# Altium PCB ATmega.PcbDoc
Units mil, origin at the board's own origin, x right, y up, seen from the top; angles counter-clockwise.
Board outline 4033 x 3869 mil, 2 copper layers (Top Layer, Bottom Layer); 73 components, 67 nets, 249 pads, 35 vias.
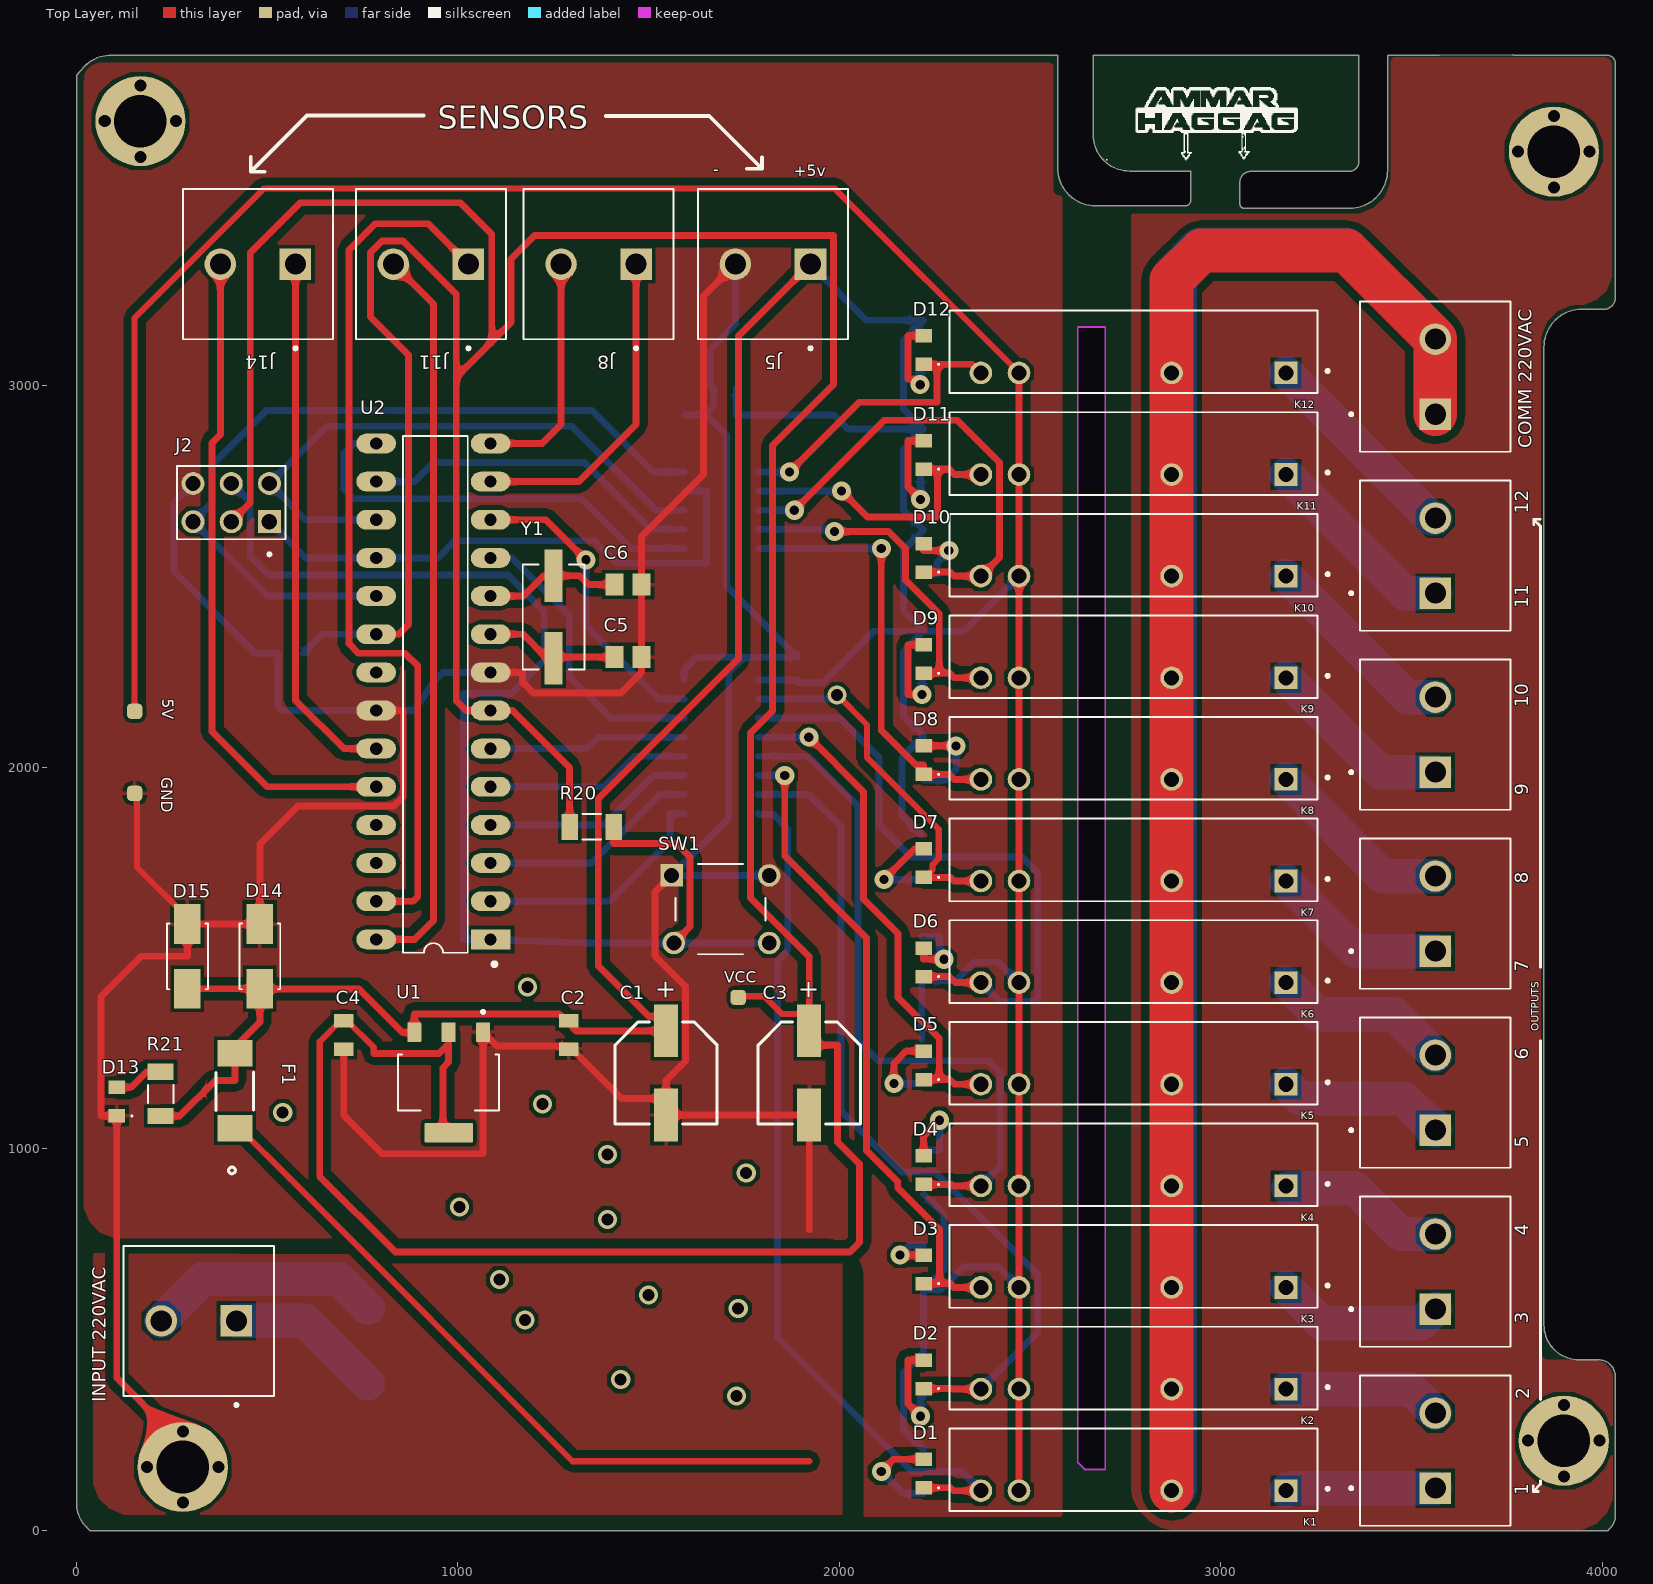
[diagram p0: Top Layer view]
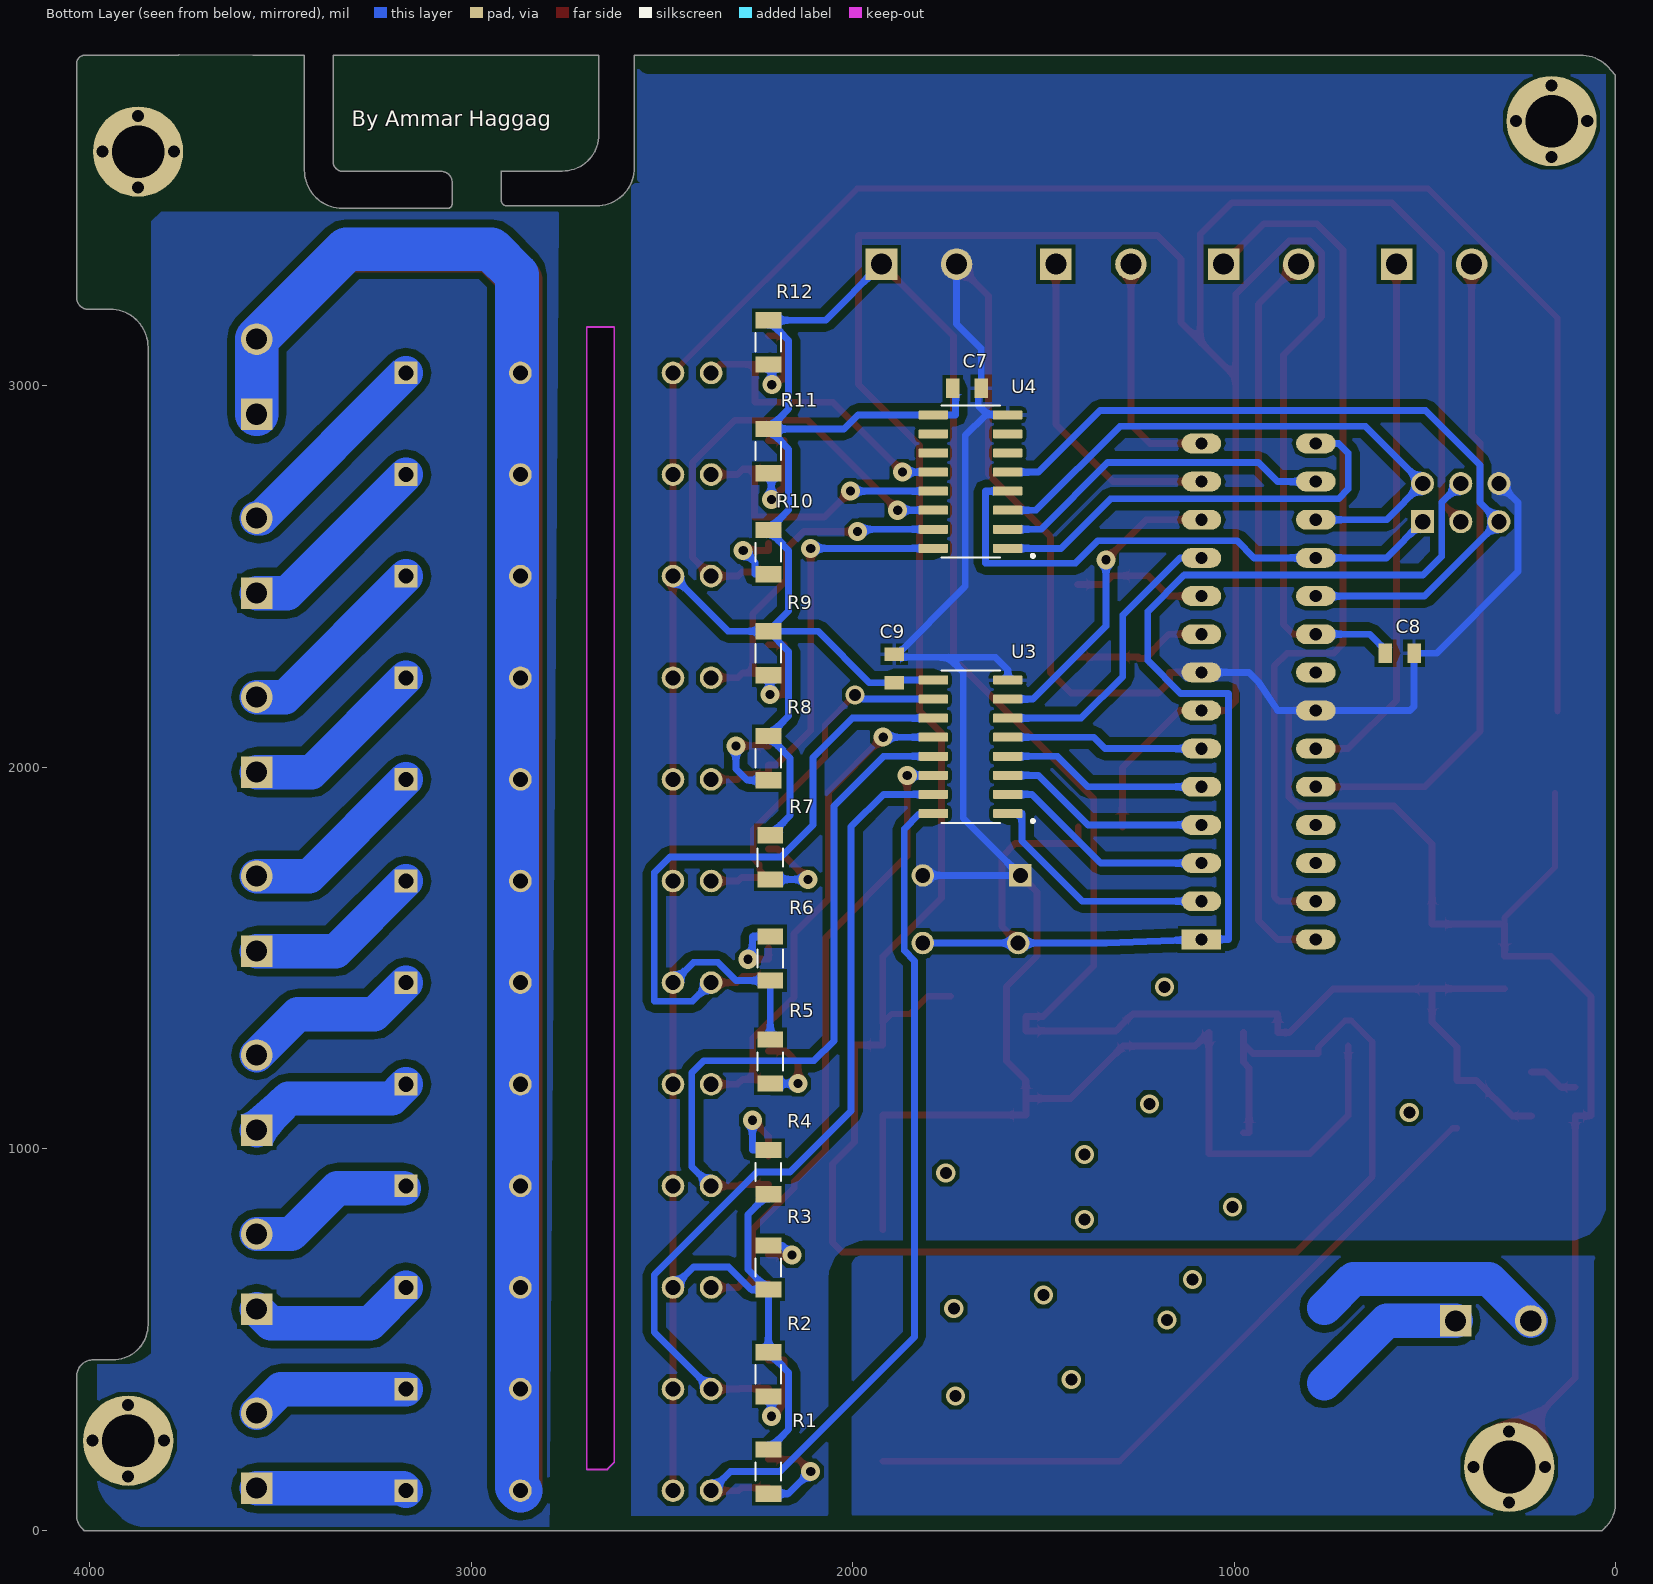
[diagram p1: Bottom Layer view, seen from below]
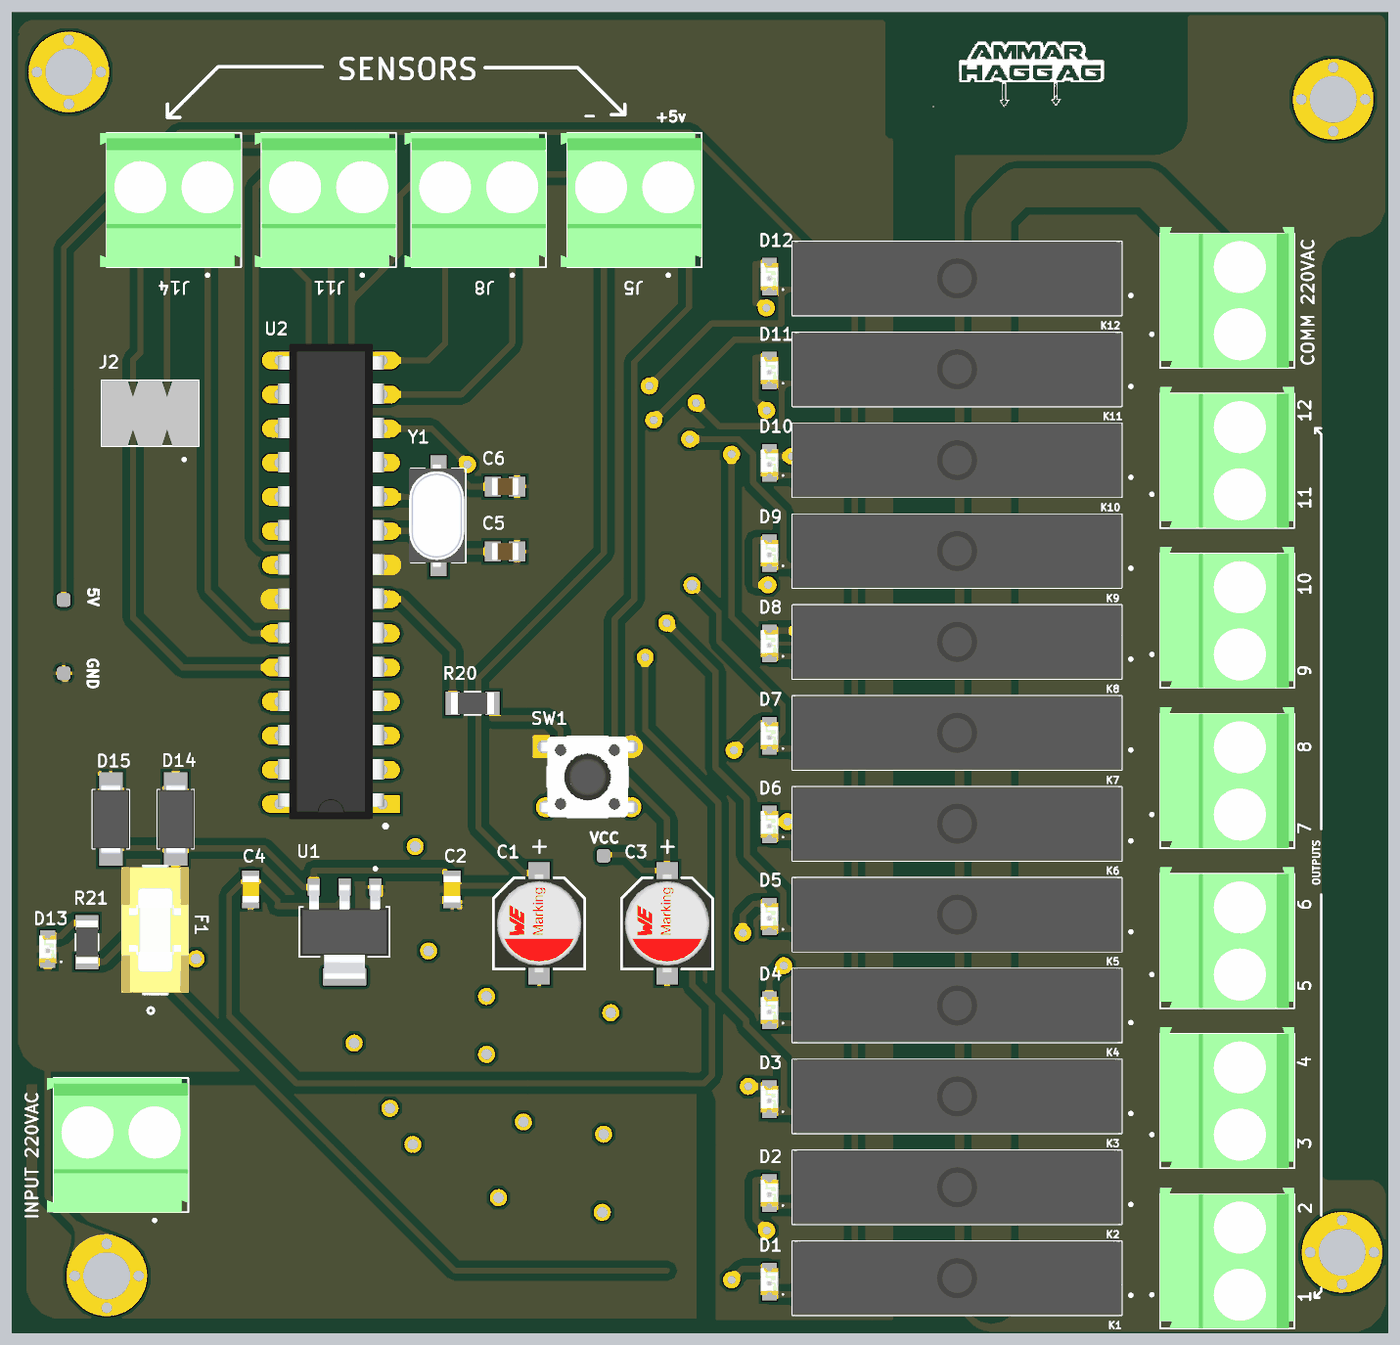
[diagram p2: 3D render of the assembled board from above, using the file's embedded part models]
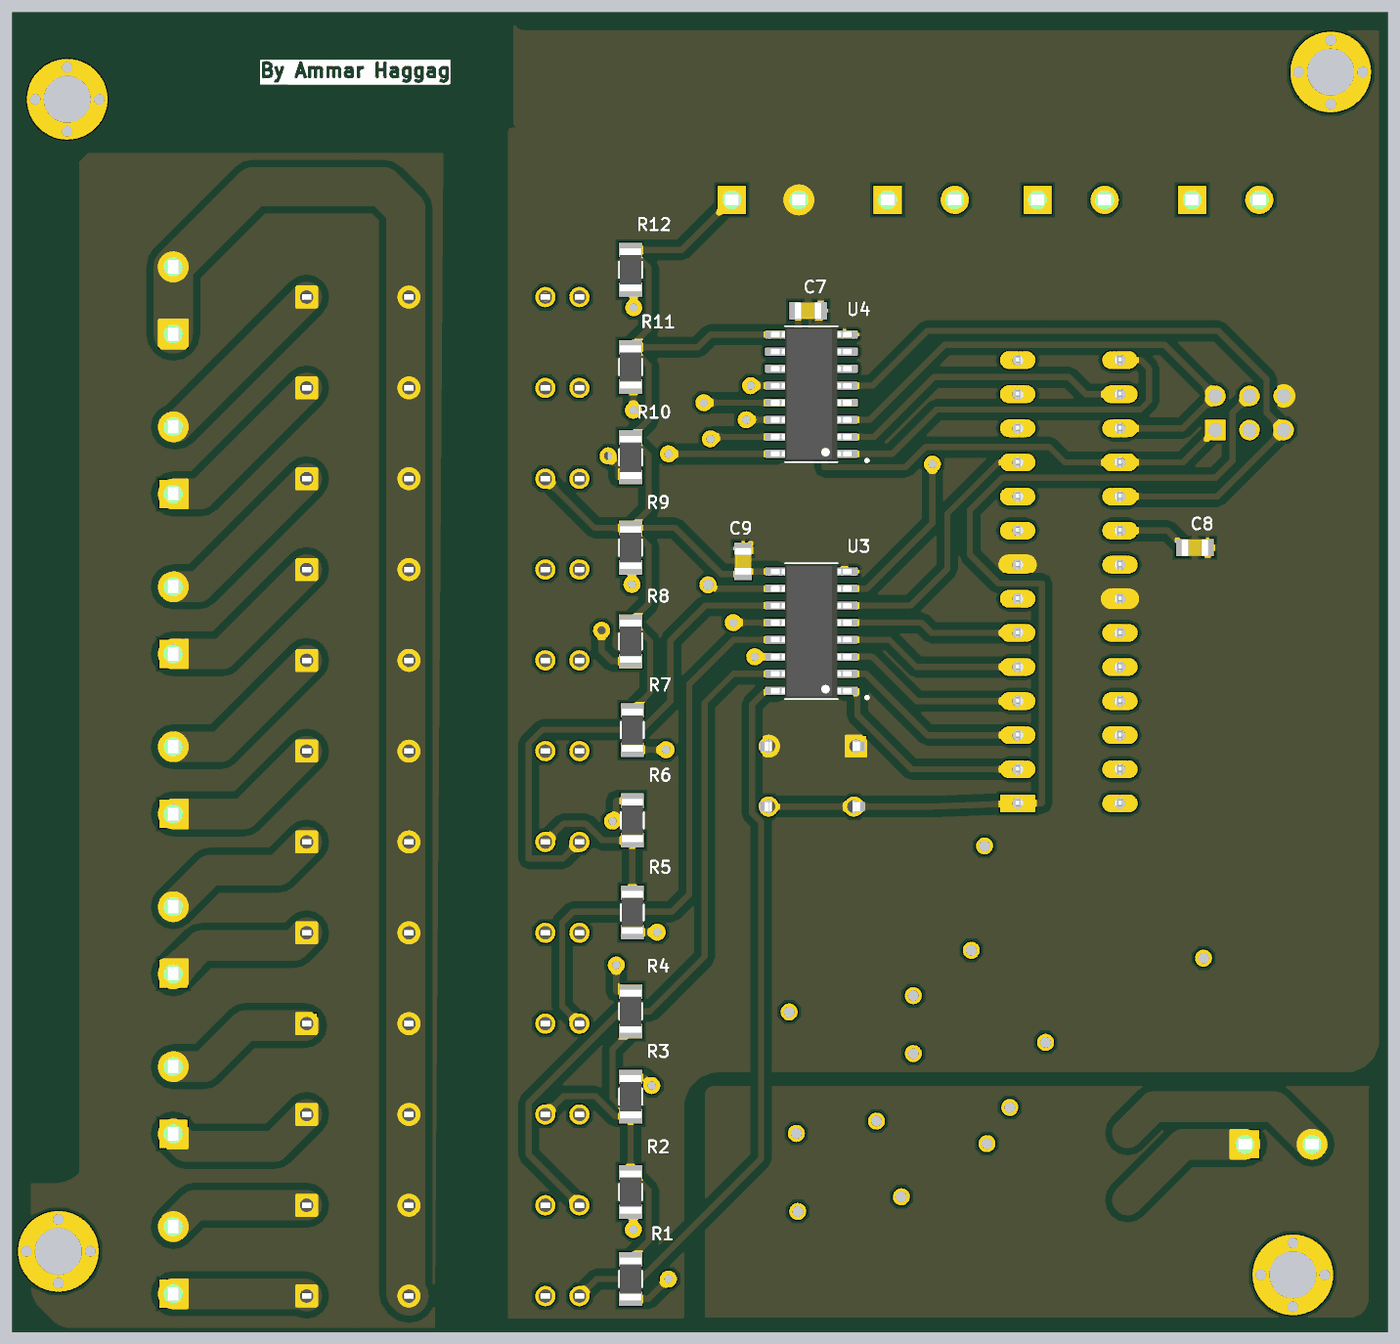
[diagram p3: 3D render of the assembled board from below, using the file's embedded part models]

## Layer stack, top to bottom
Top Solder: solder mask 0.4, Solder Resist, Dk 3.5
Top Layer: signal copper 1.4
Dielectric 1: dielectric 12.6, FR-4, Dk 4.8
Bottom Layer: signal copper 1.4
Bottom Solder: solder mask 0.4, Solder Resist, Dk 3.5

## Board outline
2572,3867 2572,3572 ccw(c2672,3572) 2672,3472 2907,3472 ccw(c2907,3486) 2921,3486 2921,3562 ccw(c2920,3562) 2920,3563 2761,3563 cw(c2761,3659) 2665,3659 2665,3867 3362,3867 3362,3588 cw(c3336,3588) 3336,3562 3078,3562 ccw(c3078,3534) 3050,3534 3050,3477 ccw(c3062,3477) 3062,3465 3337,3465 ccw(c3337,3565) 3437,3565 3437,3867 3573,3867 3765,3868 3766,3867 4012,3867 cw(c4012,3845) 4034,3845 4034,3230 cw(c4005,3230) 4005,3201 3947,3201 ccw(c3947,3101) 3847,3101 3847,539 ccw(c3939,539) 3939,447 3987,447 3991,447 cw(c3991,404) 4034,404 4034,37.65 cw(c3986.94,38.49) 4019.61,4.61 4014,-1 36,-1 27.04,7.96 cw(c84.08,68.41) 1,66 1,3815 21.71,3837.71 cw(c92.42,3767.01) 92.42,3867 2207,3867 2209,3867 2396,3867
cut-out: 2625,178 2643,160 2696,160 2697,159 2697,3154 2625,3154

## Design rules (kind name [scope] priority, off if disabled: settings)
Clearance GND_p [InNamedPolygon('GND_p')] p1: gap=10 ignorepadtopadclearanceinfootprint=FALSE except(0: Arc-Hole Track-Hole SMDPad-Hole THPad-Hole Via-Hole Fill-Hole Poly-Hole Region-Hole Text-Hole; 20: Track-Poly)
Clearance [All] p2: gap=10 ignorepadtopadclearanceinfootprint=FALSE except(20: Arc-Arc Arc-Track Track-Track)
HoleSize [All] p1: absolutevalues=TRUE maxlimit=137.8 minlimit=11.81 maxpercent=80.000 minpercent=20.000
MinimumSolderMaskSliver [All] p1: minsoldermaskwidth=1
PolygonConnect [All] p1: thpad.connectstyle=Direct thpad.reliefconductorwidth=10 thpad.reliefentries=4 thpad.polygonreliefangle="90 Angle" thpad.airgapwidth=10 smdpad.connectstyle=Relief smdpad.reliefconductorwidth=10 smdpad.reliefentries=4 smdpad.polygonreliefangle="90 Angle" smdpad.airgapwidth=10 via.connectstyle=Direct via.reliefconductorwidth=10 via.reliefentries=4 via.polygonreliefangle="90 Angle" via.airgapwidth=10
RoutingVias [All] p1: holewidth=24 width=50 viastyle="Through Hole" minholewidth=24 minwidth=50 maxholewidth=31.5 maxwidth=50
SilkToSilkClearance [All] p1: silktosilkclearance=1
SilkToSolderMaskClearance [IsPad] p1: minsilkscreentomaskgap=1 clearancetoexposedcopper=TRUE
SolderMaskExpansion [All] p1: expansion=4 istentingtop=FALSE
Width [All] p1: maxlimit=115 minlimit=16 preferedwidth=90 minimp=50.000000 maximp=50.000000 favimp=50.000000
26 further rules are at their usual default settings.

## Components (designator, comment, footprint, x,y, rotation, side; value= is the part's Value field where it differs from the comment)
1 "282856-2" TE_282856-2 3562.14,209 r90 top
3 "282856-2" TE_282856-2 3562.14,678.17 r90 top
5 "282856-2" TE_282856-2 3562.14,1147.33 r90 top
5V "TEST POINT" "TEST POINT" 153,2107 r0 top
7 "282856-2" TE_282856-2 3562.14,1616.5 r90 top
9 "282856-2" TE_282856-2 3562.14,2085.67 r90 top
11 "282856-2" TE_282856-2 3562.14,2554.83 r90 top
C1 "47uF" WCAP-ASLI_D6.3H7.7 1546,1199 r90 top
C2 "100nF" WCAP-CSGP_0805_L2W1.25H0.8_Reflow 1291,1299 r90 top
C3 "47uF" WCAP-ASLI_D6.3H7.7 1921,1199 r90 top
C4 "100nF" WCAP-CSGP_0805_L2W1.25H0.8_Reflow 701,1299 r90 top
C5 "22pf" CAPC2012X130N 1446,2289 r180 top
C6 "22pf" CAPC2012X130N 1446,2479 r180 top
C7 "100nF" WCAP-CSGP_0805_L2W1.25H0.8_Reflow 1700.53,2994 r0 bottom
C8 "100nF" WCAP-CSGP_0805_L2W1.25H0.8_Reflow 566,2299 r0 bottom
C9 "100nF" WCAP-CSGP_0805_L2W1.25H0.8_Reflow 1891,2259 r270 bottom
"COMM 220VAC" "COM" TE_282856-2 3562.14,3024 r90 top
D1 "Infrared, 1.4V, 140°" WL-SICW_0805_L2W1.3H0.8 2221,149 r90 top
D2 "Infrared, 1.4V, 140°" WL-SICW_0805_L2W1.3H0.8 2221,409 r90 top
D3 "Infrared, 1.4V, 140°" WL-SICW_0805_L2W1.3H0.8 2221,684 r90 top
D4 "Infrared, 1.4V, 140°" WL-SICW_0805_L2W1.3H0.8 2221,944 r90 top
D5 "Infrared, 1.4V, 140°" WL-SICW_0805_L2W1.3H0.8 2221,1219 r90 top
D6 "Infrared, 1.4V, 140°" WL-SICW_0805_L2W1.3H0.8 2221,1489 r90 top
D7 "Infrared, 1.4V, 140°" WL-SICW_0805_L2W1.3H0.8 2221,1749 r90 top
D8 "Infrared, 1.4V, 140°" WL-SICW_0805_L2W1.3H0.8 2221,2019 r90 top
D9 "Infrared, 1.4V, 140°" WL-SICW_0805_L2W1.3H0.8 2221,2284 r90 top
D10 "Infrared, 1.4V, 140°" WL-SICW_0805_L2W1.3H0.8 2221,2549 r90 top
D11 "Infrared, 1.4V, 140°" WL-SICW_0805_L2W1.3H0.8 2221,2819 r90 top
D12 "Infrared, 1.4V, 140°" WL-SICW_0805_L2W1.3H0.8 2221,3094 r90 top
D13 "Infrared, 1.4V, 140°" WL-SICW_0805_L2W1.3H0.8 106,1124 r90 top
D14 "S1G" DIO_S1G 481,1504.35 r90 top
D15 "S1G" DIO_S1G 291,1504.35 r90 top
F1 "0154004.DR" FUSE_0154004.DR 415.88,1054 r90 top
GND "TEST POINT" "TEST POINT" 193,1932 r90 top
"INPUT 220VAC" "282856-2" TE_282856-2 321,549 r180 top
J2 "5-146257-3" TE_5-146257-3 406,2694 r180 top
J5 "282856-2" TE_282856-2 1826,3319 r180 top
J8 "282856-2" TE_282856-2 1368.95,3319 r180 top
J11 "282856-2" TE_282856-2 929.43,3319 r180 top
J14 "282856-2" TE_282856-2 476,3319 r180 top
K1 "RELLAY" RELAY_G3MB-202PDC5 2771,159 r180 top
K2 "G3MB-202PDC5" RELAY_G3MB-202PDC5 2771,425.36 r180 top
K3 "G3MB-202PDC5" RELAY_G3MB-202PDC5 2771,691.73 r180 top
K4 "G3MB-202PDC5" RELAY_G3MB-202PDC5 2771,958.09 r180 top
K5 "G3MB-202PDC5" RELAY_G3MB-202PDC5 2771,1224.45 r180 top
K6 "G3MB-202PDC5" RELAY_G3MB-202PDC5 2771,1490.82 r180 top
K7 "G3MB-202PDC5" RELAY_G3MB-202PDC5 2771,1757.18 r180 top
K8 "G3MB-202PDC5" RELAY_G3MB-202PDC5 2771,2023.55 r180 top
K9 "G3MB-202PDC5" RELAY_G3MB-202PDC5 2771,2289.91 r180 top
K10 "G3MB-202PDC5" RELAY_G3MB-202PDC5 2771,2556.27 r180 top
K11 "G3MB-202PDC5" RELAY_G3MB-202PDC5 2771,2822.64 r180 top
K12 "G3MB-202PDC5" RELAY_G3MB-202PDC5 2771,3089 r180 top
R1 "1k" RESC3216X70N 2221,154 r90 bottom
R2 "1k" RESC3216X70N 2221,409 r90 bottom
R3 "1k" RESC3216X70N 2221,689 r270 bottom
R4 "1k" RESC3216X70N 2221,939 r270 bottom
R5 "1k" RESC3216X70N 2216,1229 r90 bottom
R6 "1k" RESC3216X70N 2216,1499 r270 bottom
R7 "1k" RESC3216X70N 2216,1764 r90 bottom
R8 "1k" RESC3216X70N 2221,2024 r90 bottom
R9 "1k" RESC3216X70N 2221,2299 r90 bottom
R10 "1k" RESC3216X70N 2221,2564 r90 bottom
R11 "1k" RESC3216X70N 2221,2829 r90 bottom
R12 "1k" RESC3216X70N 2221,3114 r90 bottom
R20 "10K" RESC3216X70N 1351,1844 r0 top
R21 "FCR1206J10R" RESC3216X70N 221,1144 r90 top value=330R
SW1 "3-1825910-1" TE_3-1825910-1 1688.24,1628.13 r0 top
U1 "AMS1117" SOT229P700X180-4N 976,1174 r270 top
U2 "ATMEGA328P-PU" DIL28 936,2199 r180 top
U3 "ULN2003AD" SOIC127P600X175-16N 1691,2054 r0 bottom
U4 "ULN2003AD" SOIC127P600X175-16N 1691,2749 r0 bottom
VCC "TEST POINT" "TEST POINT" 1775,1397 r90 top
Y1 "16MHz" XTAL_ECS-160-20-3X-TR 1251,2394 r270 top

## Footprints (in the part's own frame and the unit in brackets; to place one, negate y for a bottom-side part, rotate by r counter-clockwise, add the part's x,y. Pads: shape width x height; smd on the part's side, far side on the other; paste and mask are expansions set on the pad)
CAPC2012X130N [mm]
  rect 1.21x1.47 smd: 1(-0.898,0) 2(0.898,0)
  body extent -1.02,-0.65 0.98,0.65, height 1.21
DIL28 [mil]
  rect 104x52 hole 32: 1(-150,650)
  oval 104x52 hole 32: 2(-150,550) 3(-150,450) 4(-150,350) 5(-150,250) 6(-150,150) 7(-150,50) 8(-150,-50) 9(-150,-150) 10(-150,-250) 11(-150,-350) 12(-150,-450) 13(-150,-550) 14(-150,-650) 15(150,-650) 16(150,-550) 17(150,-450) 18(150,-350) 19(150,-250) 20(150,-150) 21(150,-50) 22(150,50) 23(150,150) 24(150,250) 25(150,350) 26(150,450) 27(150,550) 28(150,650)
  silkscreen extent -165,-670 80,720, body extent -155,-699 155,695, height 205
DIO_S1G [mm]
  rect 2.65x1.75 smd: 1(-2.15,0) 2(2.15,0)
  silkscreen extent -2.19,-1.36 2.19,1.36, body extent -2.6,-1.36 2.6,1.36, height 2.7
FUSE_0154004.DR [mm]
  rect 1.748x2.347 smd: 1(0,0) 2(5,0)
  silkscreen extent -3.03,-1.25 3.74,1.28, body extent -1.67,-2.64 8.06,2.39, height 3.81
RELAY_G3MB-202PDC5 [mm]
  rect 1.508x1.508 hole 1: 1(-10.16,1.4)
  round 1.508 hole 1: 2(-2.54,1.4) 3(7.62,1.4) 4(10.16,1.4)
  silkscreen extent -13.03,-2.75 12.25,2.75, body extent -12.25,-2.75 12.25,2.75, height 20.5
RESC3216X70N [mm]
  rect 1.08x1.72 smd: 1(-1.47,0) 2(1.47,0)
  silkscreen extent -0.61,-0.85 0.61,0.85, body extent -1.6,-0.8 1.6,0.8, height 0.71
SOIC127P600X175-16N [mm]
  rrect25% 1.97x0.6 smd: 1(-2.475,4.445) 2(-2.475,3.175) 3(-2.475,1.905) 4(-2.475,0.635) 5(-2.475,-0.635) 6(-2.475,-1.905) 7(-2.475,-3.175) 8(-2.475,-4.445) 9(2.475,-4.445) 10(2.475,-3.175) 11(2.475,-1.905) 12(2.475,-0.635) 13(2.475,0.635) 14(2.475,1.905) 15(2.475,3.175) 16(2.475,4.445)
  silkscreen extent -4.24,-5.06 1.95,5.06, body extent -3,-4.95 3,4.95, height 1.75
SOT229P700X180-4N [mm]
  rrect15% 1.31x0.93 smd: 1(-3.345,2.29) 2(-3.345,0) 3(-3.345,-2.29)
  rrect15% 1.31x3.24 smd: 4(3.345,0)
  silkscreen extent -4.8,-3.36 1.86,3.36, body extent -3.5,-3.25 3.5,3.25, height 1.8
TE_3-1825910-1 [mm]
  rect 1.498x1.498 / inner round 1.498 / far side rect 1.498x1.498 hole 0.99: 1(-3.25,2.25)
  round 1.498 hole 0.99: 2(3.25,2.25) 3(-3.1,-2.25) 4(3.25,-2.25)
  silkscreen extent -3,-3 3,3, body extent -3.9,-3 3.9,3, height 17.01
TE_5-146257-3 [mm]
  rect 1.53x1.53 / inner round 1.53 / far side rect 1.53x1.53 hole 1.02: 1(-2.54,1.27)
  round 1.53 hole 1.02: 2(0,1.27) 3(2.54,1.27) 4(-2.54,-1.27) 5(0,-1.27) 6(2.54,-1.27)
  silkscreen extent -3.61,-2.44 3.61,3.54, body extent -3.61,-2.44 3.61,2.44, height 7.77
TE_282856-2 [mm]
  rect 2.1x2.1 / inner round 2.1 / far side rect 2.1x2.1 hole 1.4: 1(-2.5,0)
  round 2.1 hole 1.4: 2(2.5,0)
  silkscreen extent -5,-5 5,5.7, body extent -5,-5 5.5,5, height 19
"TEST POINT" [mil]
  rrect50% 40x40 smd: 1(0,40)
WCAP-ASLI_D6.3H7.7 [mm] "Aluminium Electrolytic V-Chip SMT Capacitors, 6.3x7.7mm"
  rect 3.5x1.6 smd: 1(2.8,0) 2(-2.8,0)
  silkscreen extent -3.4,-3.4 3.4,3.4, body extent -3.65,-3.3 3.65,3.3, height 7.7
WCAP-CSGP_0805_L2W1.25H0.8_Reflow [mm] "Ceramic Capacitors, body 2x1.25mm"
  rect 0.9x1.3 smd: 1(-0.95,0) 2(0.95,0)
  body extent -1,-0.62 1,0.63, height 0.8
WL-SICW_0805_L2W1.3H0.8 [mm] "SMT Infrared Chip LED Waterclear, body 2x1.3mm"
  rect 0.9x1.1 smd: 1(-0.95,0) 2(0.95,0)
  silkscreen extent -1,-1.05 -0.9,-0.95, body extent -1,-0.65 1,0.65, height 0.8
XTAL_ECS-160-20-3X-TR [mm]
  rect 3.5x1.2 smd: 1(-2.75,0) 2(2.75,0)
  silkscreen extent -3.5,-2.05 3.5,2.05, body extent -3.8,-2.18 3.8,1.92, height 2.3

## Part data
1 3 5 7 9 11 "INPUT 220VAC" J5 J8 J11 J14: "TERMI-BLOK PCB MOUNT 2P", Package=None, Availability="In Stock", Check_prices=https://www.snapeda.com/parts/282856-2/TE+Connectivity+AMP+Connectors/view-part/?ref=eda, EU_RoHS_Compliance="Compliant with Exemptions", MF="TE Connectivity", MP=282856-2, Price=None, Purchase-URL=https://pricing.snapeda.com/search/part/282856-2/?ref=eda, SnapEDA_Link=https://www.snapeda.com/parts/282856-2/TE+Connectivity+AMP+Connectors/view-part/?ref=snap
C1 C3: library part 865080443007, "WCAP-ASLI Aluminum Electrolytic Capacitor, V-Chip, D6.3 x H5.5mm, 47uF, 25V", Capacitance Tolerance=+/-20%, Leakage Current=11.75uA, Manufacturer="Wurth Elektronik", Operating Temperature Max=105°C, Operating Temperature Min=-55°C, Rated Voltage (DC)=25V, Ripple Current=220mA, Capacitance=47uF, Category="Aluminum Electrolytic Capacitors", ComponentLink1Description="Website Link", ComponentLink1URL=https://www.we-online.com/redexpert/article/865080443007?ad, ComponentLink2Description="Datasheet Link", ComponentLink2URL=https://www.we-online.com/redexpert/spec/865080443007?ad, Diameter=6.3mm, Dissipation Factor=14%, Endurance=2000h, Height=5.5mm, Manufacturer Part Number=865080443007, Match Code=WCAP-ASLI, Mount="Surface Mount", Packaging="Tape and Reel", Technical Reference=ASED055470M025DVCTBB000
C2 C4 C7 C8 C9: library part 885012207072, "WCAP-CSGP Multilayer Ceramic Chip Capacitor, General Purpose, size 0805, X7R, 100nF, 25VDC", Capacitance Tolerance=+/-10%, Case/Size Code=0805, Insulation Resistance=5GOhm, Manufacturer="Wurth Elektronik", Operating Temperature Max=125°C, Operating Temperature Min=-55°C, Rated Voltage (DC)=25V, Capacitance=100nF, Category="Multilayer Ceramic Chip Capacitors", Ceramic Type=X7R, ComponentLink1Description="Website Link", ComponentLink1URL=https://www.we-online.com/redexpert/article/885012207072?ad, ComponentLink2Description="Datasheet Link", ComponentLink2URL=https://www.we-online.com/redexpert/spec/885012207072?ad, Dissipation Factor=3.5%, Height=0.8mm, Length=2mm, Manufacturer Part Number=885012207072, Match Code=WCAP-CSGP, Mount="Surface Mount", Packaging="Tape and Reel", Technical Reference=X7R0805104K025DFCT10000, Width=1.25mm
C5 C6: library part 0805Y0500220JCT, "Cap Cer 22pf 50v C0g/Np0 0805", Package="2012 Knowles Syfer", Availability=Warning, MF=Syfer, Mouser-Purchase-URL=https://snapeda.com/shop?store=Mouser&id=1818858, MP=0805Y0500220JCT, Price=None, SnapEDA_Link=https://www.snapeda.com/parts/0805Y0500220JCT/Syfer/view-part/1818858/?ref=snap
"COMM 220VAC": library part 282856-2, "TERMI-BLOK PCB MOUNT 2P", Package=None, Availability="In Stock", Check_prices=https://www.snapeda.com/parts/282856-2/TE+Connectivity+AMP+Connectors/view-part/?ref=eda, EU_RoHS_Compliance="Compliant with Exemptions", MF="TE Connectivity", MP=282856-2, Price=None, Purchase-URL=https://pricing.snapeda.com/search/part/282856-2/?ref=eda, SnapEDA_Link=https://www.snapeda.com/parts/282856-2/TE+Connectivity+AMP+Connectors/view-part/?ref=snap
D1 D2 D3 D4 D5 D6 D7 D8 D9 D10 D11 D12 D13: library part 15408085BA400, "WL-SICW SMT Chip LED Infrared Waterclear, size 0805, Infrared, 1.4V, 140°", Case/Size Code=0805, Emitting Color=Infrared, Forward Voltage=1.4V, Forward Voltage Max=2V, Manufacturer="Wurth Elektronik", Operating Temperature Max=85°C, Operating Temperature Min=-40°C, Category="Infrared LEDs", Centroid Wavelength=845nm, Chip Technology=AlGaAs, ComponentLink1Description="Website Link", ComponentLink1URL=https://www.we-online.com/redexpert/article/15408085BA400?ad, ComponentLink2Description="Datasheet Link", ComponentLink2URL=https://www.we-online.com/redexpert/spec/15408085BA400?ad, Height=0.8mm, Length=2mm, Manufacturer Part Number=15408085BA400, Match Code=WL-SICW, Mount="Surface Mount", Packaging="Tape and Reel", Peak Wavelength=850nm, Radiant Intensity=1.5mW/sr, Radiant Intensity Min=0.6mW/sr, Viewing Angle=140°, Width=1.3mm
  D1 D2 D3 D4 D5 D6 D7 D8 D9 D10 D11 D12: name="by Ammar Haggag"
D14 D15: "Diode Standard 400 V 1A Surface Mount DO-214AC (SMA)", Package="SMA Taiwan Semiconductor", Availability="In Stock", Check_prices=https://www.snapeda.com/parts/S1G/Onsemi/view-part/?ref=eda, MF="ON Semiconductor", MP=S1G, Price=None, Purchase-URL=https://pricing.snapeda.com/search/part/S1G/?ref=eda, SnapEDA_Link=https://www.snapeda.com/parts/S1G/Onsemi/view-part/?ref=snap
F1: "154/154T/154L/154TL Series OMNI-BLOKÂ® Fuse and Holder Assembly", Package=None, Availability=Unavailable, MP=0154004.DR, Price=None
J2: "Header; Breakaway; 0.100 x 0.100 in.; PC Board; Dual; 6; 0.025 in.; 0.12 in.", Package=None, Availability="In Stock", Check_prices=https://www.snapeda.com/parts/5-146257-3/TE+Connectivity+AMP+Connectors/view-part/?ref=eda, EU_RoHS_Compliance=Compliant, MF="TE Connectivity", MP=5-146257-3, Price=None, Purchase-URL=https://pricing.snapeda.com/search/part/5-146257-3/?ref=eda, SnapEDA_Link=https://www.snapeda.com/parts/5-146257-3/TE+Connectivity+AMP+Connectors/view-part/?ref=snap
K1: library part G3MB-202PDC5, "Solid State SPST-NO (1 Form A) 4-SIP", Package=None, Availability="Not in stock", Check_prices=https://www.snapeda.com/parts/G3MB-202P%20DC5/Omron+Automation+and+Safety/view-part/?ref=eda, MF="Omron Automation", MP="G3MB-202P DC5", Price=None, SnapEDA_Link=https://www.snapeda.com/parts/G3MB-202P%20DC5/Omron+Automation+and+Safety/view-part/?ref=snap
K2 K3 K4 K5 K6 K7 K8 K9 K10 K11 K12: "Solid State SPST-NO (1 Form A) 4-SIP", Package=None, Availability="Not in stock", Check_prices=https://www.snapeda.com/parts/G3MB-202P%20DC5/Omron+Automation+and+Safety/view-part/?ref=eda, MF="Omron Automation", MP="G3MB-202P DC5", Price=None, SnapEDA_Link=https://www.snapeda.com/parts/G3MB-202P%20DC5/Omron+Automation+and+Safety/view-part/?ref=snap
R1 R2 R3 R4 R5 R6 R7 R8 R9 R10 R11 R12 R20: library part FCR1206J10R, "Res 1206 10 Ohm 5% 1/8W Â±500ppm/Â°C Molded SMD SMD T/R", Package=1206, Power_Rating=".125 W", Resistance=10, Tolerance=5%, Availability=Warning, DigiKey-Purchase-URL=https://snapeda.com/shop?store=DigiKey&id=988597, EU_RoHS_Compliance="Compliant with Exemptions", MF="TE Connectivity", Mouser-Purchase-URL=https://snapeda.com/shop?store=Mouser&id=988597, MP=FCR1206J10R, name="by Ammar Haggag", Price=None, SnapEDA_Link=https://www.snapeda.com/parts/FCR1206J10R/TE%20Connectivity%20Passive%20Product/view-part/988597/?ref=snap
R21: "Res 1206 10 Ohm 5% 1/8W Â±500ppm/Â°C Molded SMD SMD T/R", Package=1206, Power_Rating=".125 W", Resistance=10, Tolerance=5%, Availability=Warning, DigiKey-Purchase-URL=https://snapeda.com/shop?store=DigiKey&id=988597, EU_RoHS_Compliance="Compliant with Exemptions", MF="TE Connectivity", Mouser-Purchase-URL=https://snapeda.com/shop?store=Mouser&id=988597, MP=FCR1206J10R, Price=None, SnapEDA_Link=https://www.snapeda.com/parts/FCR1206J10R/TE%20Connectivity%20Passive%20Product/view-part/988597/?ref=snap
SW1: "Switch Push Button OFF (ON) SPST Round Button 0.05A 24VDC Momentary Contact PC Pins Thru-Hole", Package=None, Availability="In Stock", Check_prices=https://www.snapeda.com/parts/3-1825910-1/TE+Connectivity+ALCOSWITCH+Switches/view-part/?ref=eda, MF="TE Connectivity", MP=3-1825910-1, Price=None, Purchase-URL=https://pricing.snapeda.com/search/part/3-1825910-1/?ref=eda, SnapEDA_Link=https://www.snapeda.com/parts/3-1825910-1/TE+Connectivity+ALCOSWITCH+Switches/view-part/?ref=snap
U1: "1A LOW DROPOUT VOLTAGE REGULATOR SOT-223", Package="SOT-223 Seeed Technology", Availability="Not in stock", Check_prices=https://www.snapeda.com/parts/AMS1117/Advanced+Monolithic+Systems/view-part/?ref=eda, MF="Advanced Monolithic Systems", MP=AMS1117, name="by Ammar Haggag", Price=None, SnapEDA_Link=https://www.snapeda.com/parts/AMS1117/Advanced+Monolithic+Systems/view-part/?ref=snap
U2: "ATmega Series 20 MHz 32 KB Flash 2 KB SRAM 8-Bit Microcontroller - DIP-28", Package=None, Availability=Unavailable, MP=ATMEGA328P-PU, Price=None
U3 U4: "50-V, 7-ch darlington transistor array, -20C to 70C", Package="SOIC-16 Texas Instruments", Availability="In Stock", Check_prices=https://www.snapeda.com/parts/ULN2003AD/Texas+Instruments/view-part/?ref=eda, MF="Texas Instruments", MP=ULN2003AD, Price=None, Purchase-URL=https://pricing.snapeda.com/search/part/ULN2003AD/?ref=eda, SnapEDA_Link=https://www.snapeda.com/parts/ULN2003AD/Texas+Instruments/view-part/?ref=snap
Y1: library part ECS-160-20-3X-TR, "16MHz Â±30ppm Crystal 20pF 50 Ohms HC-49/US", Package="HC49/US ECS International", Digi-Key_Part_Number=XC1776CT-ND, Digi-Key_Purchase_URL=https://www.digikey.com/product-detail/en/ecs-inc/ECS-160-20-3X-TR/XC1776CT-ND/2676640?utm_source=snapeda&utm_medium=aggregator&utm_campaign=symbol, MF="ECS Inc.", MP=ECS-160-20-3X-TR, SnapEDA_Link=https://www.snapeda.com/parts/ECS-160-20-3X-TR/ECS%20Inc./view-part/561589/?ref=snap

## Free pads (board coordinates)
  round 236.22 hole 137.8 unplated: 1(168,3694) 1(279,166) 1(3873,3614) 1(3899,235)
  round 31.5 hole 31.5 unplated: 6(168,3787.5) 6(279,259.5) 6(3873,3707.5) 6(3899,328.5) 7(168,3600.5) 7(279,72.5) 7(3873,3520.5) 7(3899,141.5) 8(261.5,3694) 8(372.5,166) 8(3966.5,3614) 8(3992.5,235) 9(74.5,3694) 9(185.5,166) 9(3779.5,3614) 9(3805.5,235)

## Via types
v1: diameter 50, hole 24, Top Layer to Bottom Layer, 21 vias
v2: diameter 50, hole 31.5, Top Layer to Bottom Layer, 14 vias

## Nets (pads, with @x,y where several pads share a name; then routed paths per layer and width w, separated by ;. In a path a pad name is that pad's centre, name@x,y a point inside that pad or via, vN(x,y) a via of type N, cw(c..) or ccw(c..) an arc to the next point about the centre after c; other vN are vias at no path point)
0: U2.2 U3.1 | length 645
  Bottom Layer w18: U2.2 1398,1649 1556,1807 1556,1879 U3.1
1: U2.3 U3.2 | length 582.1
  Bottom Layer w18: U2.3 1349.8,1749 1529.8,1929 U3.2
2: U2.4 U3.3 | length 561.4
  Bottom Layer w18: U2.4 1383.04,1849 1513.04,1979 U3.3
3: U2.5 U3.4 | length 540.7
  Bottom Layer w18: U2.5 1382.82,1949 1462.82,2029 U3.4
4: U2.6 U3.5 | length 520
  Bottom Layer w18: U2.6 1339,2049 1369,2079 U3.5
5: U2.11 U3.6 | length 775.8
  Bottom Layer w18: U2.11 1142,2549 1292,2399 1292,2238 1401,2129 U3.6
6: U2.12 U3.7 | length 804.2
  Top Layer w18: U2.12 1231,2649 v1(1336,2544)
  Bottom Layer w18: v1(1336,2544) 1336,2370 1527,2179 U3.7
7: J8.1 U2.13 | length 863.5
  Top Layer w18: U2.13 1317.38,2749 1467.38,2899 J8.1
8: J8.2 U2.14 | length 625.2
  Top Layer w18: U2.14 1220.53,2849 1270.53,2899 J8.2
9: U2.15 U4.1 | length 1147.1
  Bottom Layer w18: U2.15 726,2849 701,2824 701,2729 726,2704 1324,2704 1454,2574 U4.1
10: U2.16 U4.2 | length 900.8
  Bottom Layer w18: U2.16 886,2749 936,2799 1331.59,2799 1506.59,2624 U4.2
11: J2.4 U2.17 U4.3 | length 1560.2
  Bottom Layer w18: U2.17 601,2649 J2.4 656,2894 1299.14,2894 1519.14,2674 U4.3
12: J2.1 U2.18 U4.4 | length 1475.9
  Bottom Layer w18: J2.1 601,2549 U2.18 948,2549 993,2594 1356.93,2594 1415.93,2535 1652,2535 1652,2724 U4.4
13: J2.3 U2.19 U4.5 | length 2093.5
  Bottom Layer w18: U2.19 501,2449 J2.3 356,2694 356,2793 498,2935 1351.5,2935 1512.5,2774 U4.5
+5: 5V.1 C1.1 C2.2 C7.2 C9.2 D14.1 D15.1 F1.2 J5.1 K1.3 K2.3 K3.3 K4.3 K5.3 K6.3 K7.3 K8.3 K9.3 K10.3 K11.3 K12.3 R1.2 R2.2 R3.2 R4.2 R5.2 R6.2 R7.2 R8.2 R9.2 R10.2 R11.2 R12.2 R21.1 U1.3 U3.9 U4.9 | length 19633
  Top Layer w16: 5V.1 153,3178.34 491.66,3517 1987.88,3517 v1(2471,3033.88)
  Top Layer w18: R21.1 271,1086.13 364.46,1179.59 415.88,1179.59 415.88,1267 481,1332.12 D14.1@481,1419 ; D15.1 D14.1 D14.1@481,1419 ; J5.1 1736,3130.57 1736,2285 1368,1917 1368,1480 1501,1347 1546,1347 C1.1 1310.29,1309.24 1291,1328.53 1265.69,1353.84 885.84,1353.84 U1.3 885.84,1305 855,1305 741,1419 D14.1@481,1419 ; K1.3 K3.3 ; K4.3 K3.3 ; K5.3 K3.3 ; K6.3 K3.3 ; K7.3 K3.3 ; K8.3 K3.3 ; v1(2471,3033.88) K3.3
  Bottom Layer w18: C7.2@1730.06,2994 1730.06,2924 1986,2924 2023.13,2886.87 R11.2 ; U3.9 C9.2@1890.53,2229 ; C9.2 1955.6,2221.6 2090.87,2356.87 R9.2 ; J5.1 2071.55,3171.87 R12.2 2168,3118.87 2168,2939.87 R11.2 ; R5.2 R6.2 2305.38,1441.13 2353.26,1489 2417.7,1489 K6.3 ; R7.2 2164,1873.87 2164,2024.87 R8.2 2168,2134.87 2168,2303.87 R9.2 ; R1.2 2168,264.87 2168,413.87 R2.2 R3.2 ; R4.2 2274,828.13 2274,684.13 R3.2 ; K3.3 2417.61,690 2324.87,690 2266,631.13 R3.2 ; K10.3 2326.72,2356.87 R9.2 ; R9.2 2168,2409.87 2168,2568.87 R10.2 2168,2674.87 2168,2833.87 R11.2
A0: J14.1 U2.23 | length 1407.4
  Top Layer w18: J14.1 574.43,2175.57 701,2049 U2.23
A1: J14.2 U2.24 | length 1724
  Top Layer w18: J14.2 377.57,2872 356,2850.43 356,2094 501,1949 U2.24
A2: U2.25
A3: U2.26
A4: J11.1 U2.27 | length 2339.9
  Top Layer w18: U2.27 882,1649 895,1662 895,2266 862,2299 740,2299 715,2324 715,3356.34 783.61,3424.95 921.9,3424.95 J11.1@1027.85,3319
A5: J11.2 U2.28 | length 1934.2
  Top Layer w18: U2.28 886,1549 936,1599 936,3214 J11.2
AC1: "INPUT 220VAC.2" | length 618.3
  Bottom Layer w90: 222.57,549 332.57,659 687.34,659 763.68,582.66
AC2: "INPUT 220VAC.1" | length 411.8
  Bottom Layer w90: 419.43,549 600.49,549 763.68,385.81
COM: "COMM 220VAC.1" "COMM 220VAC.2" K1.2 K2.2 K3.2 K4.2 K5.2 K6.2 K7.2 K8.2 K9.2 K10.2 K11.2 K12.2 | length 8384.7
  Top Layer w115: K1.2 K2.2 K3.2 K4.2 K5.2 K6.2 K7.2 K8.2 K9.2 K10.2 K11.2 K12.2 2871,3277 2949,3355 3329.57,3355 3562.14,3122.42 3562.14,2925.57
  Bottom Layer w115: K1.2 2880,112.88 2880,3290.63 2947.37,3358 3326.57,3358 3562.14,3122.42 3562.14,2925.57
GND: C1.2 C2.1 C3.2 C4.1 C5.1 C6.1 C7.1 C8.1 C9.1 D13.1 D14.2 D15.2 GND.1 J2.6 J5.2 pad.1@279,166 pad.6@279,259.5 pad.7@279,72.5 pad.8@372.5,166 pad.9@185.5,166 SW1.1 SW1.2 U1.1 U2.8 U2.22 U3.8 U4.8 | length 11857.1
  Top Layer w16: GND.1@159,1932 159,1738.72 291,1606.72 D15.2 ; C3.2 1921.16,1088.61 1921.16,787.39
  Top Layer w18: pad.7@279,72.5 279,166 279,259.5 245.5,259.5 106,399 D13.1 65,1086.6 65,1399 171,1505 291,1505 D15.2 D14.2 481,1799 581,1899 832,1899 857,1924 857,2149 U2.22 ; C4.1@701,1269.47 701,1087 800.84,987.16 1066.16,987.16 U1.1 1102.38,1269.47 1291,1269.47 1428.47,1132 C1.2@1546,1132 ; U2.8 1170,2249 1170,2224 1199,2195 1427.35,2195 1481.35,2249 ; C5.1 1481.35,2249 ; SW1.1 1517,1673.42 1517,1506 1597,1426 1597,1230 1546,1179 C1.2@1546,1132 ; J5.2 1644,3235.43 1644,2768 1481.35,2605.35 1481.35,2249 ; C3.2 C1.2 C1.2@1546,1132
  Bottom Layer w18: pad.9@185.5,166 279,166 pad.8@372.5,166 ; J2.6 256,2694 256,2513 470,2299 C8.1 528.6,2159.54 539.14,2149 886,2149 936,2224 961,2249 U2.8 ; U3.8 1593,2255.53 1626,2288.53 1749.53,2288.53 ; U4.8 1646,2924 ; C7.1 1663.13,3098.13 1727.57,3162.57 J5.2 ; C7.1@1671,2994 1671,2949 1646,2924 ; SW1.2 SW1.1 1710,1866.42 1710,2249 1749.53,2288.53 ; 1646,2924 1651,2924 1705,2870 1705,2474.53 1891,2288.53 1749.53,2288.53
K1: 1.1 K1.1 | length 393.9
  Bottom Layer w90: K1.1 3177.69,110.57 1.1
K2: 1.2 K2.1 | length 417.2
  Bottom Layer w90: K2.1 3499.32,370.25 1.2
K3: 3.1 K3.1 | length 445.1
  Bottom Layer w90: K3.1 3264.61,543 3525.4,543 3.1
K4: 3.2 K4.1 | length 435
  Bottom Layer w90: K4.1@3176.97,897 3351,897 3471.41,776.59 3.2
K5: 5.1 K5.1 | length 441
  Bottom Layer w90: K5.1 3208.34,1132 3479.05,1132 5.1
K6: 5.2 K6.1 | length 469.8
  Bottom Layer w90: K6.1 3253.7,1353 3454.9,1353 5.2
K7: 7.1 K7.1 | length 467.4
  Bottom Layer w90: K7.1 3354.99,1518.07 7.1
K8: 7.2 K8.1 | length 496.1
  Bottom Layer w90: K8.1 3424.5,1714.93 7.2
K9: 9.1 K9.1 | length 493.7
  Bottom Layer w90: K9.1 3418.55,1987.24 9.1
K10: 9.2 K10.1 | length 522.5
  Bottom Layer w90: K10.1 3488.06,2184.09 9.2
K11: 11.1 K11.1 | length 520
  Bottom Layer w90: K11.1 3482.11,2456.41 11.1
K12: 11.2 K12.1 | length 548.8
  Bottom Layer w90: K12.1 3551.62,2653.26 11.2
NetD1_2: D1.2 R1.1 | length 259.4
  Top Layer w18: v1(2110,154) 2142.4,186.4 D1.2
  Bottom Layer w18: v1(2110,154) 2167.87,96.13 R1.1
NetD2_2: D2.2 R2.1 | length 262.2
  Top Layer w18: v1(2213,299) 2180,332 2180,446.4 D2.2
  Bottom Layer w18: v1(2213,299) 2213,351.13 R2.1
NetD3_2: D3.2 R3.1 | length 134.6
  Top Layer w18: v1(2159,721.4) D3.2
  Bottom Layer w18: v1(2159,721.4) 2184.47,746.87 R3.1
NetD4_2: D4.2 R4.1 | length 231.1
  Top Layer w18: D4.2 2221,1033 v1(2263,1075)
  Bottom Layer w18: R4.1 2263,996.87 v1(2263,1075)
NetD5_2: D5.2 R5.1 | length 217.3
  Top Layer w18: v1(2143,1171.13) 2143,1224 2175.4,1256.4 D5.2
  Bottom Layer w18: v1(2143,1171.13) R5.1
NetD6_2: D6.2 R6.1 | length 193.8
  Top Layer w18: D6.2 2221,1497 v1(2274,1497)
  Bottom Layer w18: R6.1 2263,1556.87 2263,1508 v1(2274,1497)
NetD7_2: D7.2 R7.1 | length 236.3
  Top Layer w18: v1(2117,1706.13) 2197.28,1786.4 D7.2
  Bottom Layer w18: v1(2117,1706.13) R7.1
NetD8_2: D8.2 R8.1 | length 242.7
  Top Layer w18: D8.2 v1(2306,2056.4)
  Bottom Layer w18: R8.1 2276,1966.13 2306,1996.13 v1(2306,2056.4)
NetD9_2: D9.2 R9.1 | length 262.5
  Top Layer w18: v1(2217,2191) 2180,2191 2180,2321.4 D9.2
  Bottom Layer w18: v1(2217,2191) 2217,2241.13 R9.1
NetD10_2: D10.2 R10.1 | length 194.1
  Top Layer w18: D10.2 2221,2568 v1(2287,2568)
  Bottom Layer w18: R10.1 2256,2506.13 2256,2537 v1(2287,2568)
NetD11_2: D11.2 R11.1 | length 286.2
  Top Layer w18: v1(2213,2702) 2180,2735 2180,2856.4 D11.2
  Bottom Layer w18: v1(2213,2702) 2213,2771.13 R11.1
NetD12_2: D12.2 R12.1 | length 254.7
  Top Layer w18: v1(2212,3003) 2197,3018 2180,3018 2180,3131.4 D12.2
  Bottom Layer w18: v1(2212,3003) 2212,3056.13 R12.1
NetD13_2: D13.2 R21.2 | length 131.8
  Top Layer w18: D13.2 143,1161.4 183.47,1201.87 R21.2
NetF1_1: F1.1 | length 1866.8
  Top Layer w16: F1.1 427.67,1054 560.35,921.32 1300.59,181.09 1921.16,181.09
R1: D1.1 K1.4 U3.16 | length 2289
  Top Layer w18: D1.1 2292,111.6 2299.72,103.88 K1.4
  Bottom Layer w18: U3.16 1791.25,1876.19 1827.46,1876.19 1864.68,1838.96 1864.68,1519.47 1838,1492.78 1838,507 2191,154 2320.88,154 K1.4
R2: D2.1 K2.4 U3.15 | length 2201.7
  Top Layer w18: D2.1 2295,371.6 2296.35,370.25 K2.4
  Bottom Layer w18: U3.15 1919.39,1929 2004,1844.39 2004,1099 2164,939 2251,939 2520,670 2520,519.25 K2.4
R3: D3.1 K3.4 U3.14 | length 1723.3
  Top Layer w18: v1(1857,1979) 1857,1767 2071,1553 2071,996 2153,914 2153,899 2263,789 2263,646.6 ; D3.1 2263,646.6 ; K3.4 2300.99,636.61 2291,646.6 2263,646.6
  Bottom Layer w18: U3.14 v1(1857,1979)
R4: D4.1 K4.4 U3.13 | length 1806.9
  Top Layer w18: D4.1 2294,906.6 2297.63,902.97 K4.4
  Bottom Layer w18: U3.13 1919,2029 2049,1899 2049,1283 2101,1231 2390,1231 2422,1199 2422,953.97 K4.4
R5: D5.1 K5.4 U3.12 | length 1325.7
  Top Layer w18: v1(1920,2079) 2063,1936 2063,1655 2154,1564 2154,1397 2262,1289 2262,1181.6 ; D5.1 2262,1181.6 ; K5.4 2301.26,1169.34 2289,1181.6 2262,1181.6
  Bottom Layer w18: U3.12 v1(1920,2079)
R6: D6.1 K6.4 U3.11 | length 1665.8
  Top Layer w18: D6.1 2288,1451.6 2303.9,1435.7 K6.4
  Bottom Layer w18: U3.11 2001,2129 2104,2026 2104,1849 2188,1765 2479,1765 2520,1724 2520,1387 2419.7,1387 K6.4
R7: D7.1 K7.4 U3.10 | length 971.6
  Top Layer w16: v2(1994,2190) 2073,2111 2073,2025.34 2260.65,1837.69 2260.65,1761.23 2244.63,1745.21 2244.63,1731.3 2224.94,1711.6 D7.1
  Top Layer w18: D7.1 2291,1711.6 2300.53,1702.06 K7.4
  Bottom Layer w18: U3.10 1974.34,2179 1985.34,2190 v2(1994,2190)
R8: D8.1 K8.4 U4.16 | length 1127.1
  Top Layer w18: v1(2110,2574) 2110,2097 2201,2006 2221,2006 D8.1 2289,1981.6 2302.17,1968.43 K8.4
  Bottom Layer w18: U4.16 v1(2110,2574)
R9: D9.1 K9.4 U4.15 | length 924.4
  Top Layer w18: v1(1987,2618) 2129,2618 2173,2574 2173,2491 2262,2402 2262,2246.6 ; D9.1 2262,2246.6 ; K9.4 2301.81,2234.79 2290,2246.6 2262,2246.6
  Bottom Layer w18: U4.15 1981,2624 v1(1987,2618)
R10: D10.1 K10.4 U4.14 | length 1247.8
  Top Layer w18: v1(1882,2674) 2118,2910 2309,2910 2420,2799 2420,2550.15 K10.4 2300.44,2501.15 2290,2511.6 D10.1
  Bottom Layer w18: U4.14 v1(1882,2674)
R11: D11.1 K11.4 U4.13 | length 778.2
  Top Layer w18: v1(2006,2724) 2074,2656 2257,2656 2257,2781.6 ; D11.1 2257,2781.6 ; K11.4 2302.08,2767.52 2288,2781.6 2257,2781.6
  Bottom Layer w18: U4.13 v1(2006,2724)
R12: D12.1 K12.4 U4.12 | length 802.4
  Top Layer w18: v1(1869,2774) 2052,2957 2256,2957 2256,3056.6 ; D12.1 2256,3056.6 ; K12.4 2348.28,3056.6 2256,3056.6
  Bottom Layer w18: U4.12 v1(1869,2774)
RESET: J2.5 R20.2 SW1.3 SW1.4 U2.1 | length 3366.1
  Top Layer w18: R20.2 1408.87,1800 1574,1800 1609,1765 1609,1582.36 SW1.3
  Bottom Layer w18: J2.5 456,2694 456,2553 505,2504 1131,2504 1226.49,2408.51 1226.49,2279.49 1141,2194 1015,2194 1015,1549 U2.1 1335.45,1539.55 SW1.3 SW1.4
VCC: C3.1 C4.2 C8.2 J2.2 R20.1 U1.2 U1.4 U2.7 U2.20 VCC.1 | length 11836.6
  Top Layer w16: 638,928 638,1281.28 693.13,1336.4 C4.2 708.87,1336.4 779.53,1265.75 779.53,1250 ; VCC.1@1743,1400 1803.12,1400 1849.23,1353.89 1897.5,1353.89 1921,1330.4 C3.1
  Top Layer w18: J2.2 456,2694 456,3349 587,3480 1006,3480 1089,3397 1089,3116 ; 638,928 836,730 2028,730 2053,755 2053,960 1995,1018 1995,1272 1921,1272 C3.1 ; 779.53,1250 951,1250 976,1275 ; U2.20 846,2349 871,2374 871,3080.66 770.66,3181 770.66,3349 801,3379.34 855.99,3379.34 996,3239.33 996,3023 ; U1.4 960.98,1042.31 960.98,1212.54 976,1227.57 976,1275 ; U1.2 976,1275 ; R20.1 1293.13,1999 1143.13,2149 U2.7 1021,2149 996,2174 996,3023 ; C3.1@1921,1330.4 1921,1504 1767,1658 1767,2090 1825,2148 1825,2844 1985,3004 1985,3394 1201,3394 1139,3332 1139,3166 1089,3116 ; 996,3023 1089,3116
  Bottom Layer w18: C8.2@595.53,2299 645.53,2349 U2.20
XTAL1: C5.2 U2.9 Y1.2 | length 354.1
  Top Layer w18: U2.9 1170.38,2349 1233.64,2285.73 Y1.2 1251,2289 C5.2
XTAL2: C6.2 U2.10 Y1.1 | length 356.3
  Top Layer w18: U2.10 1172,2449 1225.27,2502.27 Y1.1 1319,2502.27 1342.27,2479 C6.2
pads on no net: U2.21 U4.6 U4.7 U4.10 U4.11
copper on no net:
  other v2: 1731,352 1427,395 1176,551 1735,581 1500,617 1109,657 1392,815 1004,848 1756,937 1392,985 541,1095 1222,1118 1183,1424

## Polygon pours and split planes (outlines as drawn)
no net on Top Layer "GND_p" (solid, pour order 24): 44,727 44,141 ccw(c144,141) 144,41 2008,41 2008,719
GND on Top Layer "GND_p" (solid, remove dead copper, pour order 23): 25,3807 ccw(c25,3802) 20,3802 20,865 ccw(c120,865) 120,765 1964,765 cw(c1964,665) 2064,665 2064,46 cw(c2054,46) 2054,36 2579,36 ccw(c2579,41) 2584,41 2584,3490 ccw(c2574,3490) 2574,3500 cw(c2574,3513) 2561,3513 2561,3835 ccw(c2549,3835) 2549,3847 68,3847 ccw(c68,3797) 18,3797
no net on Top Layer "GND_p" (solid, pour order 22): 2765,3456 2765,114.42 ccw(c2865,114.42) 2794.29,43.71 2806.71,31.29 ccw(c2877.42,102) 2877.42,2 3927,2 ccw(c3927,102) 4027,102 4027,397 ccw(c3977,397) 3977,447 3859,447 cw(c3859,467) 3839,467 3839,3116 cw(c3935,3116) 3935,3212 ccw(c3935,3302) 4025,3302 4025,3840 ccw(c4004,3840) 4004,3861 3456,3861 ccw(c3456,3851) 3446,3851 3446,3550 cw(c3347,3550) 3347,3451 2768,3451 2768,3453 ccw(c2765,3453)
no net on Bottom Layer "GND_p" (solid, pour order 26): 41,720 1976,720 cw(c1976,693) 2003,693 2003,43 ccw(c2006,43) 2006,40 116,40 cw(c116,99) 57,99 57,705 ccw(c39,705) 39,723
GND on Bottom Layer "GND_p" (solid, pour order 25): 26,3822 26,860 ccw(c126,860) 126,760 1964,760 cw(c1964,660) 2064,660 2064,43 ccw(c2069,43) 2069,38 2581,38 2581,3518 ccw(c2568,3518) 2568,3531 2551,3531 ccw(c2551,3545) 2565,3545 2565,3847 cw(c2535,3847) 2535,3817 19,3817
no net on Bottom Layer "GND_p" (solid, pour order 18): 2770,3457 3813,3457 3838,3432 3838,465 3838.71,464.29 ccw(c3909.42,535) 3909.42,435 3980,435 3980,137.42 cw(c3880,137.42) 3950.71,66.71 3919,35 cw(c3858.64,95.36) 3858.64,10 2795,10

## Keep-outs
Keep-Out Layer:
  lines w5: 2625,178 2625,3154 2697,3154 2697,159 2696,160 2643,160 2625,178

## Silkscreen, mask and mechanical layers (free items; w line width, h text height)
Top Overlay:
  drawing of 22 lines, arcs and shapes, not listed
  text "SENSORS" at 948,3674 h60
  text "-" at 1669,3553 h30
  text "+5v" at 1881,3549 h30
  text "12" at 3806,2665 h35 r90
  text "10" at 3806,2156.92 h35 r90
  text "8" at 3806,1695.5 h35 r90
  text "OUTPUTS" at 3833,1308 h20 r90
  text "6" at 3806,1234.07 h35 r90
  text "4" at 3806,772.64 h35 r90
  text "2" at 3808,344 h35 r90
Bottom Overlay:
  text "By Ammar Haggag" at 3313,3680 h40
Mechanical 1:
  lines w5: 3726.05,3869.5 ccw(c3725.5,3840.5) 3726.02,3869.5 ; 4021.35,2.81 ccw(c3986.94,38.49) 4021.37,2.83 ; 4021.38,2.85 4021.37,2.83 ; -1.5,66 ccw(c1,66) -1.5,66 ; -1.5,66 ccw(c1,66) -1.5,65.93 ccw(c84.08,68.41) 25.3,6.16 34.23,-2.77 ; -1.5,66 ccw(c1,66) -1.5,66 ; -1.5,66 -1.5,3815 ; -1.5,3815 cw(c1,3815) -0.85,3816.69 ; -1.5,3815 cw(c1,3815) -0.85,3816.69 ; -0.85,3816.69 19.86,3839.4 ; 19.86,3839.4 cw(c21.71,3837.71) 19.94,3839.48 ; 19.86,3839.4 cw(c21.71,3837.71) 19.94,3839.48 ; 19.94,3839.48 cw(c92.42,3767) 92.4,3869.5 ; 34.23,-2.77 ccw(c36,-1) 36,-3.5 ; 34.23,-2.77 ccw(c36,-1) 36,-3.5 ; 36,-3.5 4014,-3.5 ; 92.42,3869.5 ccw(c92.42,3867) 92.4,3869.5 ; 92.42,3869.5 ccw(c92.42,3767) 92.4,3869.5 ; 92.42,3869.5 2220,3869.5 ; 2220.02,3869.5 ccw(c2220,3867) 2220,3869.5 ; 2220.02,3869.5 ccw(c2220,3814) 2220,3869.5 ; 2220.02,3869.5 cw(c2220,3814) 2275.5,3814.02 ; 2275.5,3555 ccw(c2273,3555) 2275.5,3555 ; 2275.5,3555 ccw(c2273,3555) 2275.5,3555 ; 2275.5,3555 ccw(c2373,3555) 2373,3457.5 ; 2275.5,3555 2275.5,3802 2275.5,3814 ; 2275.5,3555 2275.5,3555 ; 2275.5,3814 ccw(c2220,3814) 2275.5,3814.02 ; 2275.5,3814 ccw(c2273,3814) 2275.5,3814.02 ; 2347.5,3640 ccw(c2350,3640) 2347.5,3640 ; 2347.5,3640 ccw(c2450,3640) 2450,3537.5 ; 2347.5,3640 2347.5,3853 ; 2347.5,3640 2347.5,3640 ; 2347.5,3640 2347.5,3640 ; 2347.5,3853 ccw(c2364,3853) 2347.5,3853 ; 2347.5,3853 cw(c2364,3853) 2363.98,3869.5 ; 2347.5,3853 2347.5,3853 ; 2364,3869.5 ccw(c2364,3867) 2363.98,3869.5 ; 2364,3869.5 ccw(c2364,3853) 2363.98,3869.5 ; 2364,3869.5 3597,3869.5 cw(c3597,3840) 3626.5,3840 3626.5,3562 cw(c3592,3562) 3592,3527.5 3097.02,3527.5 ; 2373,3457.5 ccw(c2373,3455) 2373,3457.5 ; 2373,3457.5 2810,3457.5 ; 2373,3457.5 2373,3457.5 ; 2450,3537.5 ccw(c2450,3540) 2450,3537.5 ; 2450,3537.5 2857,3537.5 cw(c2857,3530) 2864.5,3530 2864.5,3512.02 ; 2450,3537.5 2450,3537.5 ; 2450,3537.5 2450,3537.5 ; 2810,3457.5 ccw(c2810,3512) 2864.5,3512 ; 2810,3457.5 2810,3457.5 ; 2864.5,3512.02 ccw(c2867,3512) 2864.5,3512 ; 2864.5,3512 2864.5,3512.02 ; 3049.5,3480 cw(c3097,3480) 3097,3527.5 ; 3049.5,3480 ccw(c3047,3480) 3049.5,3480 ; 3049.5,3480 ccw(c3076,3480) 3076,3453.5 ; 3049.5,3480 ccw(c3047,3480) 3049.5,3480 ; 3049.5,3480 ccw(c3047,3480) 3049.5,3480 ; 3049.5,3480 ccw(c3047,3480) 3049.5,3480 ; 3076,3453.5 ccw(c3076,3451) 3076,3453.5 ; 3076,3453.5 ccw(c3076,3451) 3076,3453.5 ; 3076,3453.5 ccw(c3076,3451) 3076,3453.5 ; 3076,3453.5 3599,3453.5 ; 3076,3453.5 3076,3453.5 ; 3097,3527.5 ccw(c3097,3530) 3097.02,3527.5 ; 3097,3527.5 3097.02,3527.5 ; 3599,3453.5 ccw(c3599,3551) 3696.5,3551 ; 3599,3453.5 3599,3453.5 ; 3599,3453.5 3599,3453.5 ; 3696.5,3551.02 ccw(c3699,3551) 3696.5,3551 ; 3696.5,3551.02 3696.5,3841 ; 3696.5,3551 3696.5,3551.02 ; 3696.5,3841 cw(c3699,3841) 3696.5,3841.05 ; 3696.5,3841 cw(c3699,3841) 3696.5,3841.05 ; 3696.5,3841.05 cw(c3725.5,3840.5) 3726.02,3869.5 ; 3726.02,3869.5 3732,3869.5 4012,3869.5 ; 3726,3869.5 3726.02,3869.5 ; 3849.5,539 ccw(c3939,539) 3939,449.5 ; 3849.5,539 ccw(c3847,539) 3849.5,539 ; 3849.5,539 3849.5,3101 ; 3849.5,539 3849.5,539 ; 3849.5,539 3849.5,539 ; 3849.5,3101 cw(c3947,3101) 3947,3198.5 ; 3849.5,3101 3849.5,3101 ; 3939,449.5 ccw(c3939,447) 3939,449.5 ; 3939,449.5 ccw(c3939,447) 3939,449.5 ; 3939,449.5 3987,449.5 3991,449.5 cw(c3991,404) 4036.5,404 4036.5,37.65 ; 3939,449.5 3939,449.5 ; 3947,3198.5 ccw(c3947,3201) 3947.02,3198.5 ; 3947.02,3198.5 4005,3198.5 ; 3947,3198.5 3947.02,3198.5 ; 4005,3198.5 ccw(c4005,3230) 4036.5,3229.98 ; 4005,3198.5 4005,3198.5 ; 4012.02,3869.5 ccw(c4012,3867) 4012,3869.5 ; 4012.02,3869.5 ccw(c4012,3845) 4012,3869.5 ; 4012.02,3869.5 cw(c4012,3845) 4036.5,3845.02 ; 4014,-3.5 ccw(c4014,-1) 4015.77,-2.77 ; 4014,-3.5 ccw(c4014,-1) 4015.77,-2.77 ; 4015.77,-2.77 4021.37,2.83 ; 4021.37,2.83 ccw(c3986.94,38.49) 4036.5,37.6 ; 4036.5,37.6 ccw(c4034,37.65) 4036.5,37.65 ; 4036.5,37.6 ccw(c4034,37.65) 4036.5,37.65 ; 4036.5,3230 ccw(c4034,3230) 4036.5,3230 ; 4036.5,3229.98 ccw(c4034,3230) 4036.5,3230 ; 4036.5,3229.98 ccw(c4005,3230) 4036.5,3230 ; 4036.5,3230 4036.5,3845 ; 4036.5,3845 ccw(c4012,3845) 4036.5,3845.02 ; 4036.5,3845 ccw(c4034,3845) 4036.5,3845.02 ; 4036.5,3845 ccw(c4012,3845) 4036.5,3845

## Text inside footprints (layer, text, board x,y; h text height)
C1: Top Overlay "+" at 1565.68,1389.94 h48 r90
C3: Top Overlay "+" at 1940.68,1389.94 h48 r90